# Altium PCB HW_Z-BAND_SMART_AMP_R1.PcbDoc (part 5 of 5)
Units mil, origin at the board's own origin, x right, y up, seen from the top; angles counter-clockwise.
Board outline 10200 x 3900 mil, 4 copper layers (Top Layer, Int1 (GND), Int2 (PWR), Bottom Layer), stack 60.134 mil thick; 398 components, 240 nets, 1098 pads, 2492 vias.
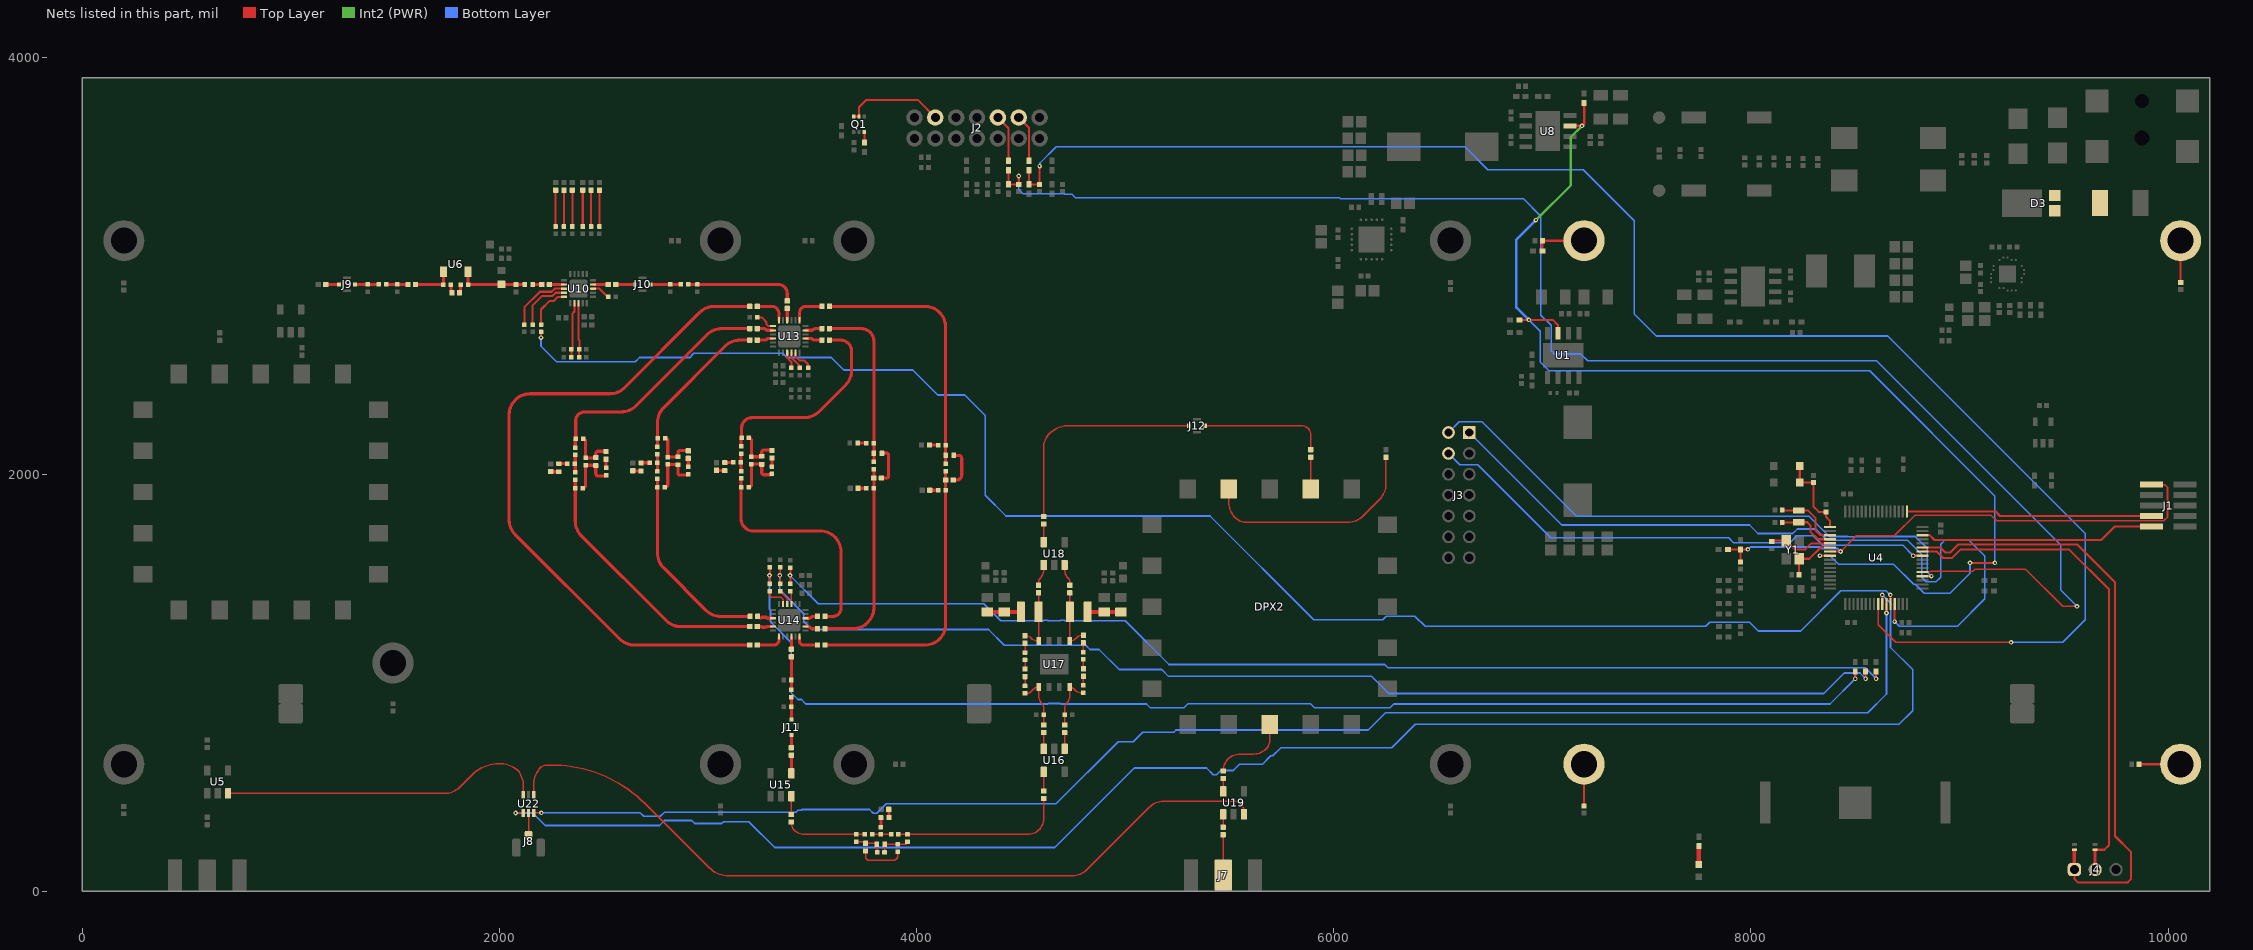
[diagram p6: the nets of this part, all layers, seen from the top]

## Via types
v1: diameter 22, hole 10, Top Layer to Bottom Layer, tented both sides, 2396 vias
v2: diameter 19.68, hole 7.87, Top Layer to Bottom Layer, tented both sides, 30 vias
v3: diameter 19.68, hole 7.87, Top Layer to Bottom Layer, 28 vias
v4: diameter 19.68, hole 9.84, Top Layer to Bottom Layer, tented both sides, 20 vias
v5: diameter 15.75, hole 7.87, Top Layer to Bottom Layer, tented both sides, 9 vias
v6: diameter 23.62, hole 11.81, Top Layer to Bottom Layer, 9 vias

## Nets (pads, with @x,y where several pads share a name; then routed paths per layer and width w, separated by ;. In a path a pad name is that pad's centre, name@x,y a point inside that pad or via, vN(x,y) a via of type N, cw(c..) or ccw(c..) an arc to the next point about the centre after c; other vN are vias at no path point) (continued)
NetC110_2: C110.2 J9.A | length 64.1
  Top Layer w15: C110.2@1168.11,2910 J9.A@1232.2,2910
NetC112_1: C112.1 R49.2 R51.2 | length 104.2
  Top Layer w15: R49.2@1457.72,2910 R51.2@1510,2910 C112.1@1561.89,2910
NetC112_2: C112.2 R5.2 U6.1 | length 195.7
  Top Layer w15: C112.2@1598.11,2910 1598.11,2909.45 R5.2@1731.89,2909.45 1732.28,2909.45 1732.28,2970 U6.1@1731.89,2970
NetC113_1: C113.1 U10.14 | length 72.1
  Top Layer w15: U10.14@2449.89,2909.68 2521.57,2909.68 C113.1@2521.89,2910
NetC113_2: C113.2 J10.C | length 91.1
  Top Layer w15: C113.2@2558.11,2910 J10.C@2649.21,2910
NetC116_1: C116.1 L7.1 R67.2 R98.1 | length 218.3
  Top Layer w15: R67.2@3196.85,2174.8 cw(c3196.85,2162.99) 3208.66,2162.99 R98.1@3208.66,2084.25 L7.1@3256.3,2084.25 ; L7.1@3257.87,2085.83 3257.87,2105.91 cw(c3267.72,2105.91) 3267.72,2115.75 C116.1@3305.51,2115.75
NetC116_2: C116.2 R97.1 | length 40.9
  Top Layer w15: R97.1@3307.09,2037.01 C116.2@3307.09,2077.95
NetC117_1: C117.1 L19.2 | length 43.8
  Top Layer w15: L19.2@2160,2910 C117.1@2203.78,2910
NetC117_2: C117.2 U10.2 | length 70.1
  Top Layer w15: C117.2@2240,2910 2309.69,2910 U10.2@2310,2909.68
NetC118_2: C118.2 R58.1 | length 174.2
  Top Layer w10: R58.1@2270,3187.72 C118.2@2270,3361.89
NetC119_2: C119.2 R59.1 | length 174.2
  Top Layer w10: R59.1@2480,3187.72 C119.2@2480,3361.89
NetC120_2: C120.2 R125.1 | length 174.2
  Top Layer w10: R125.1@2440,3187.72 C120.2@2440,3361.89
NetC121_2: C121.2 R126.1 | length 174.2
  Top Layer w10: R126.1@2400,3187.72 C121.2@2400,3361.89
NetC122_2: C122.2 R127.1 | length 174.2
  Top Layer w10: R127.1@2350,3187.72 C122.2@2350,3361.89
NetC123_2: C123.2 R128.1 | length 174.2
  Top Layer w10: R128.1@2310,3187.72 C123.2@2310,3361.89
NetC130_1: C130.1 U13.24 | length 155.6
  Top Layer w15: C130.1@3236.61,2805.12 3305.12,2805.12 cw(c3305.12,2769.45) 3340.79,2769.45 U13.24@3340.79,2738.39
NetC130_2: C130.2 C131.2 | length 3297.1
  Top Layer w15: C131.2@3200.39,1181.1 2647.72,1181.1 cw(c2647.72,1281.1) 2577.01,1210.39 2076.53,1710.87 cw(c2147.24,1781.58) 2047.24,1781.58 2047.24,2285.83 cw(c2147.24,2285.83) 2147.24,2385.83 2529.44,2385.83 ccw(c2529.44,2485.83) 2600.16,2415.12 2960.87,2775.83 cw(c3031.58,2705.12) 3031.58,2805.12 C130.2@3200.39,2805.12
NetC131_1: C131.1 U14.19 | length 134.2
  Top Layer w15: C131.1@3236.61,1181.1 3314.96,1181.1 ccw(c3314.96,1206.93) 3340.79,1206.93 U14.19@3340.79,1222.24
NetC132_1: C132.1 R80.2 R83.2 | length 535.1
  Top Layer w15: R80.2@2905.43,2910 R83.2@2950,2910 3338.03,2910 cw(c3338.03,2867.87) 3380.16,2867.87 C132.1@3380.16,2831.5
NetC132_2: C132.2 U13.22 | length 56.9
  Top Layer w15: U13.22@3380.16,2738.39 C132.2@3380.16,2795.28
NetC133_1: C133.1 U14.22 | length 60.8
  Top Layer w15: C133.1@3399.84,1161.42 U14.22@3399.84,1222.24
NetC133_2: C133.2 R81.1 R84.2 | length 158.3
  Top Layer w15: R81.1@3399.84,966.93 R84.2@3399.84,1013.78 C133.2@3399.84,1125.2
NetC134_1: C134.1 J11.A | length 60.2
  Top Layer w15: C134.1@3399.84,689.37 J11.A@3399.84,749.61
NetC134_2: C134.2 U15.6 | length 87
  Top Layer w15: U15.6@3399.84,566.18 C134.2@3399.84,653.15
NetC135_1: C135.1 U15.1 | length 87
  Top Layer w6.81: C135.1@3399.84,369.37 U15.1@3399.84,456.34
NetC135_2: C135.2 R108.1 R132.1 | length 386.1
  Top Layer w6.81: C135.2@3399.84,333.15 ccw(c3459.37,333.15) 3459.37,273.62 R108.1@3751.97,273.62
NetC139_1: C139.1 R86.2 | length 44.6
  Top Layer w6.81: R86.2@4520,985.43 C139.1@4520,1030
NetC139_2: C139.2 R87.1 | length 43.8
  Top Layer w6.81: C139.2@4520,1066.22 R87.1@4520,1110
NetC140_1: C140.1 R87.2 | length 44.6
  Top Layer w6.81: R87.2@4520,1145.43 C140.1@4520,1190
NetC140_2: C140.2 C141.2 L5.1 U17.8 | length 303.7
  Top Layer w6.81: C140.2@4520,1226.22 4522.91,1226.22 cw(c4522.91,1187.91) 4550,1215 4550.45,1214.55 ccw(c4585,1249.09) U17.8@4585,1200.24 L5.1@4585,1340 C141.2@4585,1431.89
NetC141_1: C141.1 U18.3 | length 103.7
  Top Layer w6.81: C141.1@4585,1468.11 4585,1481.03 cw(c4617.39,1481.03) 4594.49,1503.94 ccw(c4557.04,1541.39) 4610,1541.39 U18.3@4610,1565.08
NetC142_1: C142.1 J12.A | length 1084.4
  Top Layer w6.81: C142.1@4610,1798.11 4610,2147.44 4621.04,2174.09 4632.1,2190.64 cw(c4739.24,2083.5) 4708.7,2231.91 cw(c4716.22,2195.38) 4716.22,2232.68 J12.A@5306.69,2232.68
NetC142_2: C142.2 U18.4 | length 87
  Top Layer w6.81: U18.4@4610,1674.92 C142.2@4610,1761.89
NetC143_1: C143.1 DPX2.7 | length 151.9
  Top Layer w6.81: DPX2.7@5890,1930 C143.1@5890,2081.89
NetC143_2: C143.2 J12.C | length 611.2
  Top Layer w6.81: J12.C@5382.28,2232.68 5846.06,2232.68 ; C143.2@5890,2118.11 5890,2188.74 ccw(c5846.06,2188.74) 5853.65,2232.02 ; 5846.06,2232.68 cw(c5846.06,2188.74) 5853.65,2232.02 ; 5846.06,2232.68 5852.06,2232.68 cw(c5852.06,2230.42) 5853.65,2232.02
NetC144_1: C144.1 R109.2 R133.1 | length 836
  Top Layer w6.81: R109.2@3913.39,273.62 R133.1@3956.69,273.62 4534.29,273.62 ccw(c4534.29,349.33) 4610,349.33 C144.1@4610,445.47
NetC144_2: C144.2 U16.6 | length 91.9
  Top Layer w6.81: C144.2@4610,481.69 U16.6@4610,573.58
NetC145_1: C145.1 U16.1 | length 78.5
  Top Layer w6.81: U16.1@4610,683.43 C145.1@4610,761.89
NetC145_2: C145.2 R86.1 R90.1 U17.1 | length 263.3
  Top Layer w6.81: R86.1@4520,950 4532.93,950 ccw(c4532.93,967.07) 4545,955 4558.99,968.99 cw(c4585,942.98) U17.1@4585,979.76 4585,937.92 ccw(c4630.84,937.92) 4598.43,905.51 cw(c4570.48,877.57) 4610,877.57 R90.1@4610,846.46 C145.2@4610,798.11
NetC146_1: C146.1 U19.4 | length 62
  Top Layer w6.81: U19.4@5470,479.84 C146.1@5470,541.89
NetC146_2: C146.2 DPX2.18 | length 379.5
  Top Layer w6.81: C146.2@5470,578.11 cw(c5550.89,578.11) 5550.89,659 5617.03,659 ccw(c5617.03,740.94) 5674.97,683 ccw(c5631.08,726.89) 5693.15,726.89 DPX2.18@5693.15,800.08
NetC147_1: C147.1 J7.1 | length 193.9
  Top Layer w6.81: J7.1@5470,78 C147.1@5470,271.89
NetC147_2: C147.2 U19.3 | length 61.9
  Top Layer w6.81: C147.2@5470,308.11 U19.3@5470,370
NetC148_1: C148.1 U18.1 | length 103.7
  Top Layer w6.81: U18.1@4710,1565.08 4710,1541.39 ccw(c4762.96,1541.39) 4725.51,1503.94 cw(c4702.61,1481.03) 4735,1481.03 C148.1@4735,1468.11
NetC148_2: C148.2 C152.2 L6.2 U17.5 | length 304.7
  Top Layer w6.81: C148.2@4735,1431.89 L6.2@4735,1340 U17.5@4735,1200.24 ccw(c4735,1237.02) 4761.01,1211.01 4765,1215 cw(c4796.65,1183.35) 4796.65,1228.11 C152.2@4800,1228.11
NetC149_1: C149.1 DPX2.9 | length 1096.3
  Top Layer w6.81: DPX2.9@5496.3,1930 5496.3,1865.12 ccw(c5596.3,1865.12) 5525.59,1794.41 5530,1790 ccw(c5578.28,1838.28) 5578.28,1770 6068.58,1770 ccw(c6068.58,1870) 6139.29,1799.29 6220.71,1880.71 ccw(c6150,1951.42) 6250,1951.42 C149.1@6250,2081.89
NetC150_1: C150.1 U16.3 | length 78.5
  Top Layer w6.81: U16.3@4710,683.43 C150.1@4710,761.89
NetC150_2: C150.2 R91.2 R94.1 U17.4 | length 261.8
  Top Layer w6.81: C150.2@4710,798.11 R91.2@4710,846.46 4710,877.57 cw(c4749.52,877.57) 4721.57,905.51 ccw(c4689.16,937.92) 4735,937.92 U17.4@4735,979.76 cw(c4735,955.05) 4752.47,972.53 4760,965 ccw(c4790.7,995.7) 4790.7,952.28 R94.1@4800,952.28
NetC151_1: C151.1 R94.2 | length 44.2
  Top Layer w6.81: R94.2@4800,987.72 C151.1@4800,1031.89
NetC151_2: C151.2 R95.1 | length 44.2
  Top Layer w6.81: C151.2@4800,1068.11 R95.1@4800,1112.28
NetC152_1: C152.1 R95.2 | length 44.2
  Top Layer w6.81: R95.2@4800,1147.72 C152.1@4800,1191.89
NetC156_1: C156.1 L8.1 R57.1 R73.2 | length 223.2
  Top Layer w15: R73.2@2401.57,2169.29 cw(c2401.57,2157.48) 2413.39,2157.48 R57.1@2413.39,2078.74 2461.02,2078.74 ccw(c2461.02,2080.31) L8.1@2462.6,2080.31 2462.6,2100.39 cw(c2472.44,2100.39) 2472.44,2110.24 2510.24,2110.24 cw(c2510.24,2108.66) C156.1@2511.81,2108.66
NetC156_2: C156.2 R55.1 | length 40.9
  Top Layer w15: R55.1@2511.81,2031.5 C156.2@2511.81,2072.44
NetC157_2: C157.2 L9.1 | length 36.5
  Top Layer w15: C157.2@3044.19,2017.72 L9.1@3080.71,2017.72
NetC158_1: C158.1 L13.1 R107.1 R132.2 | length 145.8
  Top Layer w6.81: R132.2@3710.63,238.19 3748.43,238.19 cw(c3748.43,230.71) C158.1@3755.91,230.71 3805.12,230.71 cw(c3805.12,226.38) L13.1@3809.45,226.38 cw(c3809.45,224.8) 3811.02,224.8 R107.1@3811.02,187.01
NetC158_2: C158.2 R106.1 | length 224.6
  Top Layer w6.81: C158.2@3755.91,194.49 3755.91,165.35 ccw(c3771.65,165.35) 3771.65,149.61 3889.76,149.61 ccw(c3889.76,169.29) 3909.45,169.29 R106.1@3909.45,190.94
NetC159_2: C159.2 L18.1 | length 40
  Top Layer w15: C159.2@3866.54,393.7 cw(c3866.54,392.52) 3867.72,392.52 L18.1@3867.72,354.33
NetC160_2: C160.2 MTG10.0 | length 200
  Top Layer w10: C160.2@7200,410 MTG10.0@7200,610
NetC161_2: C161.2 MTG11.0 | length 200
  Top Layer w10: C161.2@9860,610 MTG11.0@10060,610
NetC162_2: C162.2 MTG12.0 | length 200
  Top Layer w10: C162.2@10060,2920 MTG12.0@10060,3120
NetC163_2: C163.2 MTG13.0 R1.2 | length 250
  Top Layer w12: R1.2@7000,3070 C163.2@7000,3120 MTG13.0@7200,3120
NetC164_1: C164.1 U13.2 | length 77.7
  Top Layer w15: C164.1@3236.61,2698.03 3267.17,2698.03 cw(c3267.17,2680.56) 3279.53,2692.91 ccw(c3286.18,2699.57) 3286.18,2690.16 U13.2@3312.24,2690.16
NetC164_2: C164.2 R73.1 R96.1 | length 1144
  Top Layer w15: R96.1@2364.17,2127.95 2364.17,2164.54 cw(c2370.89,2164.54) R73.1@2366.14,2169.29 2366.14,2255.91 cw(c2409.45,2255.91) 2409.45,2299.21 2584.56,2299.21 ccw(c2584.56,2399.21) 2655.27,2328.5 2995.51,2668.74 cw(c3066.22,2598.03) 3066.22,2698.03 C164.2@3200.39,2698.03
NetC165_1: C165.1 R99.2 R115.1 | length 1260.2
  Top Layer w15: R99.2@2364.17,1974.41 R115.1@2364.17,1933.07 2364.17,1775.67 ccw(c2464.17,1775.67) 2393.46,1704.96 2799.45,1298.97 ccw(c2870.16,1369.68) 2870.16,1269.68 C165.1@3200.39,1269.68
NetC165_2: C165.2 U14.17 | length 79.1
  Top Layer w15: C165.2@3236.61,1269.68 cw(c3238.52,1267.78) 3238.52,1270.47 3256.29,1270.47 3260.27,1266.5 3273.27,1266.5 3275.27,1268.5 3281.73,1268.5 3283.71,1270.47 U14.17@3312.24,1270.47
NetC166_1: C166.1 U13.15 | length 80.8
  Top Layer w15: U13.15@3467.76,2650.79 3491.58,2650.79 cw(c3491.58,2633.31) 3503.94,2645.67 ccw(c3510.59,2652.32) 3510.59,2642.91 C166.1@3546.46,2642.91
NetC166_2: C166.2 R67.1 R100.1 | length 981.9
  Top Layer w15: R100.1@3159.45,2133.46 R67.1@3159.45,2174.8 ; R67.1@3161.42,2174.8 3161.42,2220.47 cw(c3212.6,2220.47) 3212.6,2271.65 3462.52,2271.65 ccw(c3462.52,2371.65) 3533.23,2300.94 3659.69,2427.4 ccw(c3588.98,2498.11) 3688.98,2498.11 3688.98,2590.55 ccw(c3636.61,2590.55) 3636.61,2642.91 C166.2@3582.68,2642.91
NetC167_1: C167.1 R68.1 R101.2 | length 1131.8
  Top Layer w15: R101.2@3159.45,1979.92 R68.1@3159.45,1938.58 3159.45,1785.43 ccw(c3216.54,1785.43) 3216.54,1728.35 3537.8,1728.35 cw(c3537.8,1628.35) 3637.8,1628.35 3637.8,1357.42 cw(c3599.27,1357.42) 3599.27,1318.9 C167.1@3561.42,1318.9
NetC167_2: C167.2 U14.4 | length 59.9
  Top Layer w15: U14.4@3467.76,1309.84 3483.71,1309.84 ccw(c3483.71,1327.32) 3496.06,1314.96 cw(c3505.57,1305.46) 3505.57,1318.9 C167.2@3525.2,1318.9
NetC168_2: C168.2 L4.1 L19.1 R6.2 U6.3 | length 332.5
  Top Layer w15: U6.3@1850,2970 R6.2@1850,2909.45 2010,2909.45 L4.1@2010,2910 C168.2@2080,2910 L19.1@2121.42,2910
NetC169_1: C169.1 R5.1 | length 40.5
  Top Layer w15: R5.1@1767.32,2909.45 cw(c1767.32,2907.48) 1769.29,2907.48 C169.1@1769.29,2870.08
NetC169_2: C169.2 R6.1 | length 44.5
  Top Layer w15: C169.2@1805.51,2870.08 ccw(c1805.51,2879.13) 1814.57,2879.13 R6.1@1814.57,2909.45
NetC170_2: C170.2 L10.1 | length 39.7
  Top Layer w15: C170.2@2246.06,2013.39 ccw(c2248.91,2016.24) 2248.91,2012.2 L10.1@2285.43,2012.2
NetC171_1: C171.1 L16.1 R104.1 R121.2 | length 218.3
  Top Layer w15: R121.2@2795.59,2173.15 cw(c2795.59,2161.34) 2807.4,2161.34 R104.1@2807.4,2082.6 L16.1@2855.04,2082.6 ; L16.1@2856.61,2084.17 2856.61,2104.25 cw(c2866.46,2104.25) 2866.46,2114.09 C171.1@2904.25,2114.09
NetC171_2: C171.2 R103.1 | length 40.9
  Top Layer w15: R103.1@2905.83,2035.35 C171.2@2905.83,2076.3
NetC172_1: C172.1 U13.4 | length 77.7
  Top Layer w15: C172.1@3236.61,2642.91 3272.87,2642.91 ccw(c3272.87,2652.32) 3279.53,2645.67 cw(c3291.88,2633.31) 3291.88,2650.79 U13.4@3312.24,2650.79
NetC172_2: C172.2 R110.1 R121.1 | length 737.8
  Top Layer w15: R110.1@2758.19,2131.81 2758.19,2248.26 cw(c2858.19,2248.26) 2787.48,2318.97 3082.13,2613.62 cw(c3152.84,2542.91) 3152.84,2642.91 C172.2@3200.39,2642.91
NetC173_1: C173.1 C175.1 R112.2 R118.2 | length 954.7
  Top Layer w15: C175.1@3561.42,1259.84 3695.28,1259.84 ccw(c3695.28,1359.84) 3795.28,1359.84 R118.2@3795.28,1933.07 C173.1@3795.28,1982.28 R112.2@3795.28,2023.62
NetC173_2: C173.2 L11.2 | length 178.8
  Top Layer w15: C173.2@3831.5,1982.28 3856.3,1982.28 ccw(c3856.3,1992.13) 3866.14,1992.13 3866.14,2090.55 ccw(c3854.33,2090.55) 3854.33,2102.36 3835.83,2102.36 ccw(c3835.83,2100.39) L11.2@3833.86,2100.39
NetC174_1: C174.1 U13.17 | length 80.8
  Top Layer w15: U13.17@3467.76,2690.16 3497.28,2690.16 ccw(c3497.28,2699.57) 3503.94,2692.91 cw(c3516.29,2680.56) 3516.29,2698.03 C174.1@3546.46,2698.03
NetC174_2: C174.2 L11.1 R112.1 R117.2 | length 825.7
  Top Layer w15: C174.2@3582.68,2698.03 3735.04,2698.03 cw(c3735.04,2637.8) 3795.28,2637.8 R117.2@3795.28,2149.61 L11.1@3795.28,2100.39 R112.1@3795.28,2059.06
NetC175_2: C175.2 U14.2 | length 60.3
  Top Layer w15: U14.2@3467.76,1270.47 3475.97,1270.47 cw(c3475.97,1247.62) 3492.13,1263.78 ccw(c3501.63,1273.28) 3501.63,1259.84 C175.2@3525.2,1259.84
NetC176_1: C176.1 R111.2 R131.1 | length 941.4
  Top Layer w15: R111.2@2758.19,1978.27 R131.1@2758.19,1936.93 2758.19,1621.82 ccw(c2858.19,1621.82) 2787.48,1551.1 2990.4,1348.19 ccw(c3061.11,1418.9) 3061.11,1318.9 C176.1@3201.97,1318.9
NetC176_2: C176.2 U14.15 | length 80.4
  Top Layer w15: C176.2@3238.19,1318.9 ccw(c3260.05,1340.76) 3255.32,1310.21 3259.94,1314.83 3279.41,1314.83 3284.39,1309.84 U14.15@3312.24,1309.84
NetC177_2: C177.2 L17.1 | length 36.5
  Top Layer w15: C177.2@2642.93,2016.06 L17.1@2679.45,2016.06
NetC179_2: C179.2 R118.1 | length 40.9
  Top Layer w15: C179.2@3718.9,1933.07 R118.1@3759.84,1933.07
NetC187_1: C187.1 C189.1 R122.2 R124.2 | length 1368.2
  Top Layer w15: C189.1@3561.42,1181.1 4039.68,1181.1 ccw(c4039.68,1281.1) 4139.68,1281.1 R124.2@4139.68,1923.39 R122.2@4139.69,2013.94
NetC187_2: C187.2 L14.2 | length 180.4
  Top Layer w15: C187.2@4175.91,1972.6 4175.91,1972.44 4192.91,1972.44 ccw(c4192.91,1996.06) 4216.54,1996.06 4216.54,2074.8 ccw(c4200.63,2074.8) 4200.63,2090.71 L14.2@4178.27,2090.71
NetC188_1: C188.1 U13.19 | length 160.6
  Top Layer w15: U13.19@3439.21,2738.39 3439.21,2773.86 cw(c3470.47,2773.86) 3470.47,2805.12 C188.1@3546.46,2805.12
NetC188_2: C188.2 L14.1 R122.1 R123.2 | length 1269.8
  Top Layer w15: C188.2@3582.68,2805.12 4039.69,2805.12 cw(c4039.69,2705.12) 4139.69,2705.12 R123.2@4139.69,2139.92 L14.1@4139.69,2090.71 R122.1@4139.69,2049.37
NetC189_2: C189.2 U14.24 | length 119.5
  Top Layer w15: U14.24@3439.21,1222.24 3439.21,1198.58 ccw(c3456.69,1198.58) 3441.21,1190.46 3448.57,1183.1 ccw(c3456.69,1198.58) 3456.69,1181.1 C189.2@3525.2,1181.1
NetC190_2: C190.2 R124.1 | length 40.9
  Top Layer w15: C190.2@4063.31,1923.39 R124.1@4104.25,1923.39
NetD3_2: D3.2 F1.2
NetD6_1: D6.1 R32.1 | length 87.8
  Top Layer w20: D6.1@7750,129.53 R32.1@7750,217.36
NetJ2_9: J2.9 Q1.2 Q1.3 | length 485.7
  Top Layer w10: Q1.3@3698.82,3714.8 Q1.2@3724.41,3714.8 3724.41,3759.41 3760,3795 4005,3795 J2.9@4090,3710
NetJ8_1: J8.1 U22.5 | length 106.7
  Top Layer w6.81: J8.1@2140,270.04 U22.5@2140,376.69
NetJ9_C: J9.C R49.1 R50.2 | length 114.5
  Top Layer w15: J9.C@1307.8,2910 R50.2@1370,2910 R49.1@1422.28,2910
NetJ10_A: J10.A R80.1 R82.2 | length 145.2
  Top Layer w15: J10.A@2724.8,2910 R82.2@2820,2910 R80.1@2870,2910
NetJ11_C: J11.C R81.2 R85.2 | length 106.3
  Top Layer w15: J11.C@3399.84,825.2 R85.2@3399.84,885.83 R81.2@3399.84,931.5
NetL5_2: L5.2 R88.1 R89.1 | length 160.4
  Top Layer w20: R88.1@4340,1340 R89.1@4420,1340 L5.2@4500.35,1340
NetL6_1: L6.1 R92.2 R93.2 | length 160.4
  Top Layer w20: L6.1@4819.65,1340 R92.2@4900,1340 R93.2@4980,1340
NetL7_2: L7.2 R68.2 R97.2 R98.2 | length 254.2
  Top Layer w15: R68.2@3194.88,1938.58 ccw(c3194.88,1952.36) 3208.66,1952.36 R98.2@3208.66,2048.82 L7.2@3254.07,2048.82 ; L7.2@3257.87,2047.24 3257.87,2007.48 ccw(c3267.72,2007.48) 3267.72,1997.64 R97.2@3303.15,1997.64
NetL8_2: L8.2 R55.2 R57.2 R115.2 | length 264.6
  Top Layer w15: R115.2@2399.61,1933.07 ccw(c2399.61,1946.85) 2413.39,1946.85 R57.2@2413.39,2043.31 2458.8,2043.31 cw(c2458.8,2037.93) L8.2@2462.6,2041.73 2462.6,2001.97 ccw(c2472.44,2001.97) 2472.44,1992.13 2507.87,1992.13 ccw(c2507.87,1996.06) R55.2@2511.81,1996.06
NetL9_2: L9.2 R105.1 | length 40.4
  Top Layer w15: L9.2@3081.66,2056.69 R105.1@3122.05,2056.69
NetL10_2: L10.2 R102.1 | length 41.4
  Top Layer w15: L10.2@2285.43,2050.79 cw(c2286.38,2049.84) 2286.38,2051.18 R102.1@2326.77,2051.18
NetL12_2: L12.2 R117.1 | length 41.7
  Top Layer w15: L12.2@3718.11,2149.61 R117.1@3759.84,2149.61
NetL13_2: L13.2 R106.2 R107.2 R133.2 | length 155.7
  Top Layer w6.81: R107.2@3846.46,187.01 ccw(c3846.46,188.58) 3848.03,188.58 L13.2@3848.03,226.38 R106.2@3909.45,226.38 3944.88,226.38 ccw(c3944.88,238.19) R133.2@3956.69,238.19
NetL15_2: L15.2 R123.1 | length 41.7
  Top Layer w15: L15.2@4062.52,2139.92 R123.1@4104.25,2139.92
NetL16_2: L16.2 R103.2 R104.2 R131.2 | length 254.2
  Top Layer w15: R131.2@2793.62,1936.93 ccw(c2793.62,1950.71) 2807.4,1950.71 R104.2@2807.4,2047.17 L16.2@2852.81,2047.17 ; L16.2@2856.61,2045.59 2856.61,2005.83 ccw(c2866.46,2005.83) 2866.46,1995.98 R103.2@2901.89,1995.98
NetL17_2: L17.2 R113.1 | length 40.4
  Top Layer w15: L17.2@2680.4,2055.04 R113.1@2720.79,2055.04
NetL18_2: L18.2 R114.1 | length 45.7
  Top Layer w15: R114.1@3828.74,309.06 3829.13,309.06 L18.2@3829.13,354.33
NetQ1_6: Q1.6 R48.2 | length 50
  Top Layer w10: R48.2@3750,3590 Q1.6@3750,3640
NetR52_2: R52.2 U10.13 | length 89
  Top Layer w10: U10.13@2449.89,2890 2480,2890 2520,2850 R52.2@2522.28,2850
NetR53_1: R53.1 U4.28 | length 7523.2
  Top Layer w10: v1(2200,2655) R53.1@2200,2682.28 ; v1(8668.63,1422) 8668.9,1421.73 U4.28@8668.9,1378.5
  Bottom Layer w8: v1(2200,2655) 2200,2614.43 2274.43,2540 2556,2540 2651.72,2540 2671.72,2560 2915.31,2560 2920,2564.69 2920,2568.28 2931.72,2580 3358.28,2580 3378.28,2560 3591.72,2560 3651.72,2500 3981.72,2500 4101.72,2380 4231,2380 4329,2282 4329,1900 4429,1800 5407,1800 5904.55,1302.45 6234.17,1302.45 6251.72,1320 6389,1320 6438,1271 7782.72,1271 7801.72,1290 7993.28,1290 8034.28,1249 8238,1249 8431,1442 8647.04,1442 8667.04,1422 v1(8668.63,1422)
NetR53_2: R53.2 U10.5 | length 207.4
  Top Layer w10: R53.2@2200,2717.72 2200,2790 2240,2830 2260,2830 2280.63,2850.63 U10.5@2310,2850.63
NetR54_2: R54.2 U10.4 | length 267.3
  Top Layer w10: R54.2@2160,2717.72 2160,2810 2205,2855 2255,2855 2270.31,2870.31 U10.4@2310,2870.31
NetR56_1: R56.1 U10.3 | length 309.6
  Top Layer w10: R56.1@2120,2717.72 2120,2800 2195,2875 2250,2875 2265,2890 U10.3@2310,2890
NetR60_2: R60.2 R61.2 U10.7 | length 266.2
  Top Layer w10: R61.2@2345.43,2560 R60.2@2345.43,2600 2350,2604.57 2350,2770 2360.26,2780.26 U10.7@2360.26,2820.06
NetR62_2: R62.2 R63.2 U10.8 | length 264.1
  Top Layer w10: U10.8@2379.94,2820.06 2379.94,2799.64 2379,2798.7 2379,2781.3 2379.94,2780.36 2379.94,2645.06 2385,2640 2385,2602.72 R62.2@2382.28,2600 R63.2@2382.28,2560
NetR69_2: R69.2 R75.2 R116.2 | length 5929.6
  Top Layer w8: R75.2@3297.24,1474.41 3297.24,1512.76 v1(3295,1515) 3297.24,1517.24 R69.2@3297.24,1554.68
  Top Layer w10: v1(8500,1020) R116.2@8500,1054.72
  Bottom Layer w8: v1(3295,1515) 3295,1353.28 3300,1348.28 3300,1292.92 3400,1192.92 3400,951.72 3431.72,920 3448.28,920 3469.28,899 4628.7,899 4630.7,901 4689.3,901 4691.3,899 5102.72,899 5121.72,880 5281.72,880 5301.72,900 5888.28,900 5908.28,880 6268.28,880 6287.28,899 8379,899 v1(8500,1020)
NetR70_2: R70.2 R77.2 R119.2 | length 5669.9
  Top Layer w8: R77.2@3346.46,1474.41 3346.46,1512.76 v1(3344.21,1515) 3346.46,1517.24 R70.2@3346.46,1554.68
  Top Layer w10: v1(8550,1020) R119.2@8550,1054.72
  Bottom Layer w8: v1(3344.21,1515) 3344.21,1446.79 3460,1331 3460,1295 3499,1256 4345,1256 4421,1180 4471.72,1180 4488.28,1180 4811.72,1180 4831.72,1160 4875,1160 4971,1064 5175,1064 5208,1031 6182,1031 6264,949 8349,949 8447,1047 8498.72,1047 8523,1047 v1(8550,1020)
NetR71_2: R71.2 R79.2 R120.2 | length 5531.1
  Top Layer w8: R79.2@3395.67,1474.41 3395.67,1512.76 v1(3393.43,1515) 3395.67,1517.24 R71.2@3395.67,1552.72
  Top Layer w10: v1(8600,1020) R120.2@8600,1054.72
  Bottom Layer w8: v1(3393.43,1515) 3528.43,1380 3591.72,1380 3608.28,1380 3671.72,1380 3688.28,1380 3751.72,1380 3768.28,1380 3811.72,1380 3828.28,1380 4091.72,1380 4108.28,1380 4322,1380 4404,1298 4611,1298 4610.36,1298.64 4611.72,1300 4628.28,1300 4630.28,1298 4689.72,1298 4691.72,1300 4708.28,1300 4710.28,1298 5000,1298 5210,1088 6243.72,1088 6259.72,1072 8548,1072 v1(8600,1020)
NetR72_2: R72.2 U13.1 | length 99.3
  Top Layer w10: R72.2@3236.22,2751.97 3258.03,2751.97 3280,2730 3280,2720 3290.16,2709.84 U13.1@3312.24,2709.84
NetR74_2: R74.2 U13.11 | length 110.8
  Top Layer w10: U13.11@3419.53,2582.87 3419.53,2565.47 3440,2545 3463,2545 3480,2528 R74.2@3480,2510.63
NetR75_1: R75.1 U14.11 | length 113.8
  Top Layer w8: R75.1@3297.24,1438.98 3297.24,1417.76 3305,1410 3350,1410 3360.47,1399.53 U14.11@3360.47,1377.76
NetR76_2: R76.2 U13.10 | length 88.9
  Top Layer w10: U13.10@3399.84,2582.87 3400,2582.72 3400,2560 3440,2520 R76.2@3440,2510.63
NetR77_1: R77.1 U14.10 | length 75.2
  Top Layer w8: R77.1@3346.46,1438.98 3346.46,1438.54 3380.16,1404.84 U14.10@3380.16,1377.76
NetR78_2: R78.2 U13.9 | length 80.5
  Top Layer w10: U13.9@3380.16,2582.87 3380.16,2557.84 3400,2538 R78.2@3400,2510.63
NetR79_1: R79.1 U14.9 | length 62.9
  Top Layer w8: R79.1@3395.67,1438.98 3399.84,1434.8 U14.9@3399.84,1377.76
NetR96_2: R96.2 R99.1 R102.2 | length 82.7
  Top Layer w15: R99.1@2364.17,2009.84 R96.2@2364.17,2092.52
NetR100_2: R100.2 R101.1 R105.2 | length 82.7
  Top Layer w15: R101.1@3159.45,2015.35 R100.2@3159.45,2098.03
NetR108_2: R108.2 R109.1 R114.2 | length 90.6
  Top Layer w6.81: R108.2@3787.4,273.62 R109.1@3877.95,273.62
NetR110_2: R110.2 R111.1 R113.2 | length 82.7
  Top Layer w15: R111.1@2758.19,2013.7 R110.2@2758.19,2096.38
NetU4_26: U4.26 U22.4 | length 7787.6
  Top Layer w8: v1(2078,376.39) 2078.31,376.69 U22.4@2114.41,376.69
  Top Layer w10: v1(8629.26,1422) 8629.53,1421.73 U4.26@8629.53,1378.5
  Bottom Layer w8: v1(2078,376.39) 2160.61,376.39 2221,316 2767.72,316 2791.72,340 2922.36,340 2936.42,325.94 3067.06,325.94 3076.12,335 3196,335 3320,211 4663,211 5044,592 5389.72,592 5421.72,560 5438.28,560 5458.28,580 5518.28,580 5548.28,610 5658.28,610 5698.28,650 5708.28,650 5747.28,689 6278,689 6390,801 8710,801 8775,866 8775,1064 8669,1170 8669,1326.24 8669.48,1326.72 8669.48,1381.78 v1(8629.26,1422)
NetU4_27: U4.27 U22.6 | length 7181.1
  Top Layer w8: U22.6@2165.59,376.69 2201.69,376.69 v1(2202,377)
  Top Layer w10: U4.27@8649.21,1378.5 8649.21,1335.27 v1(8649.48,1335)
  Bottom Layer w8: v1(2202,377) 2674.72,377 2691.72,360 2771.72,360 2791.72,380 3421.72,380 3431.72,390 3448.28,390 3451.28,393 3774.54,393 3792.62,374.92 3809.19,374.92 3854.27,420 4668.28,420 4966.28,718 5039,718 5085,764 5234,764 5244,774 6165,774 6248,857 8560,857 8649.48,946.48 v1(8649.48,1335)
NetU5_1: U5.1 U22.3 | length 1567.4
  Top Layer w6.81: U5.1@700,470 1738.58,470 ccw(c1738.58,570) 1809.29,499.29 1870.43,560.43 cw(c1995.88,434.98) 1995.88,612.39 cw(c2002.22,480.55) 2096.49,572.94 2114.41,529.06 U22.3@2114.41,463.31
NetU19_1: U19.1 U22.1 | length 3882.5
  Top Layer w6.81: U22.1@2165.59,463.31 2165.59,514.17 cw(c2283.57,514.17) 2200.15,597.59 2217.63,605.41 cw(c2252.78,-23.3) 2698.04,421.96 3006.91,113.09 ccw(c3098.87,205.05) 3098.87,75 4745.58,75 ccw(c4745.58,175) 4816.29,104.29 5114.71,402.71 cw(c5185.42,332) 5185.42,432 5525.44,432 cw(c5525.44,394.44) 5552,421 cw(c5508.54,377.54) 5570,377.54 U19.1@5570,370
NRST: C56.2 J1.10 R22.2 R30.2 U4.7 | length 2548.1
  Top Layer w8: v1(8430,1630) 8505,1705 8687,1705 8786.13,1804.13 9150.87,1804.13 9178.57,1776.43 9978.53,1776.43 9996.69,1794.59 9996.69,1938.31 9985,1950 J1.10@9919.88,1950
  Top Layer w10: R30.2@7890,1640 R22.2@7950,1640 ; C56.2@7950,1580 R22.2@7950,1640 ; v1(7985,1640) R22.2@7950,1640 ; U4.7@8378.5,1629.53 8429.53,1629.53 v1(8430,1630)
  Bottom Layer w10: v1(7985,1640) 7985.86,1640 7996.86,1651 8332.2,1651 8338.2,1645 8413.14,1645 8428.14,1630 v1(8430,1630)
OSC24M_IN: C59.1 U4.5 Y1.3 | length 310
  Top Layer w10: C59.1@8100,1678.54 8103.31,1681.85 Y1.3@8168.5,1681.85 8198.86,1651.5 8198.86,1650.15 8204.72,1644.29 8206.06,1644.29 8210.35,1640 8260,1640 8288.9,1668.9 U4.5@8378.5,1668.9
OSC24M_OUT: C62.1 U4.6 Y1.1 | length 246.7
  Top Layer w10: C62.1@8230,1518.54 8230,1593.74 Y1.1@8231.5,1595.24 8280.24,1595.24 8334.21,1649.21 U4.6@8378.5,1649.21
OSC32_IN: C57.1 U4.3 Y2.2 | length 313.5
  Top Layer w10: C57.1@8150,1828.54 8151.46,1827.09 Y2.2@8230,1827.09 8272.91,1827.09 8310,1790 8310,1730 8331.73,1708.27 U4.3@8378.5,1708.27
OSC32_OUT: C58.1 U4.4 Y2.1 | length 280.4
  Top Layer w10: C58.1@8150,1768.54 8228.54,1768.54 Y2.1@8230,1770 8270,1770 8285,1755 8285,1725 8321.42,1688.58 U4.4@8378.5,1688.58
PD_OUTADJ: J3.4 U4.41 | length 2502.3
  Top Layer w10: v1(8778,1609.57) 8778.27,1609.84 U4.41@8821.5,1609.84
  Bottom Layer w8: J3.4@6549.8,2100 6603.8,2046 6690,2046 7041,1695 7893,1695 7916,1672 8187,1672 8220,1705 8298,1705 8344,1659 8728.57,1659 v1(8778,1609.57)
RF_PWR_EN: R3.2 R39.2 U1.3 U4.8 U8.3 | length 5531.7
  Top Layer w8: v1(9050,1575) v1(9169,1575)
  Top Layer w10: R3.2@6890,2740 v1(6935,2740) 7050,2740 7075,2715 U1.3@7075,2676.3 ; v1(8330,1610) 8330.16,1609.84 U4.8@8378.5,1609.84
  Top Layer w12: U8.3@7132.6,3670 v1(7190,3670) 7200,3680 R39.2@7200,3780
  Int2 (PWR) w12: v1(6969,3218) 7136,3385 7136,3616 v1(7190,3670)
  Bottom Layer w8: v1(6935,2740) 6990,2685 6990,2538 7032,2496 8569,2496 9169,1896 v1(9169,1575) ; v1(8330,1610) 8379,1610 8420,1569 8683,1569 8779.91,1472.09 8787.91,1472.09 8830,1430 8954,1430 9050,1526 v1(9050,1575)
  Bottom Layer w12: v1(6935,2740) 6876,2799 6876,3125 v1(6969,3218)
RIGHT_BUT: J2.13 R21.1 | length 228.1
  Top Layer w10: J2.13@4490,3710 4540,3660 R21.1@4540,3502.64
RIGHT_BUT_uC: C22.2 R21.2 R24.1 U4.25 | length 7878.4
  Top Layer w8: U4.25@8609.84,1378.5 8609.84,1279.16 8694,1195 9246,1195 v1(9247,1194)
  Top Layer w10: R21.2@4540,3457.36 R24.1@4540,3390 C22.2@4590,3390 v1(4590,3477)
  Bottom Layer w8: v1(4590,3477) 4591.76,3478.76 4591.76,3491.76 4670,3570 6629,3570 6739,3460 7196,3460 7440,3216 7440,2988 7440,2768 7545.5,2662.5 8655.5,2662.5 9602,1716 9602,1302 9494,1194 v1(9247,1194)
SPI2_MOSI: J3.2 U4.36 | length 2754.3
  Top Layer w10: U4.36@8821.5,1511.42 8864.73,1511.42 v1(8865,1511.68)
  Bottom Layer w8: J3.2@6549.8,2200 6601.8,2252 6711,2252 7164,1799 8278,1799 8375,1702 8463.62,1702 8464.62,1701 8637.7,1701 8638.7,1702 8788,1702 8845.15,1644.85 8845.15,1638.23 8845,1638.08 8845,1531.68 v1(8865,1511.68)
SPI2_SCLK: J3.1 U4.29 | length 3840.6
  Top Layer w10: U4.29@8688.58,1378.5 8688.58,1294.42 v1(8689,1294)
  Bottom Layer w8: J3.1@6649.8,2200 7092.8,1757 7993,1757 8034,1716 8201,1716 8223,1738 8310,1738 8365,1683 8750,1683 8818,1615 8818,1507 8840,1485 8887,1485 8909,1507 8909,1664 8930,1685 9044,1685 9121,1608 9121,1403 8990,1272 8711,1272 v1(8689,1294)
SWDCLK: J1.4 U4.49 | length 1181.1
  Top Layer w10: U4.49@8747.64,1821.5 9172.5,1821.5 9194,1800 J1.4@9919.88,1800
SWDIO: J1.2 U4.46 | length 1134.9
  Top Layer w10: U4.46@8821.5,1708.27 8856.73,1708.27 8880,1685 9680,1685 9745,1750 J1.2@9919.88,1750
UART1_RX: D1.2 J4.1 U4.43 | length 2902.8
  Top Layer w10: U4.43@8821.5,1649.21 8907.79,1649.21 8932,1625 8956,1625 8995,1664 9563,1664 9745,1482 9745,266 9821,190 9821,59 9806,44 9567,44 9550,61 J4.1@9550,105
  Top Layer w15: J4.1@9550,105 D1.2@9550,200
UART1_TX: D10.2 J4.2 U4.42 | length 2399.9
  Top Layer w10: U4.42@8821.5,1629.53 8891.47,1629.53 8923,1598 8963,1598 9004,1639 9525.25,1639 9716,1448.25 9716,222 9694,200 D10.2@9650,200
  Top Layer w15: J4.2@9650,105 D10.2@9650,200
uC_VBAT: C63.2 C64.2 D7.2 D9.2 U4.1 | length 411.4
  Top Layer w10: D9.2@8234.02,2040 D7.2@8234.02,1960 C63.2@8300,1960 8300,1845 8325,1820 C64.2@8360,1820 8360,1795 8378.5,1776.5 U4.1@8378.5,1747.64
UP_BUT: J2.12 R45.1 | length 228.1
  Top Layer w10: J2.12@4390,3710 4440,3660 R45.1@4440,3502.64
UP_BUT_uC: C24.2 R25.1 R45.2 U4.37 | length 7419.6
  Top Layer w8: U4.37@8821.5,1531.1 8822.63,1532.23 8859.23,1532.23 8862,1535 9064,1535 9074,1545 9316,1545 9494,1367 v1(9563,1367)
  Top Layer w10: R45.2@4440,3457.36 R25.1@4440,3390 C24.2@4490,3390 v1(4490,3430)
  Bottom Layer w8: v1(4490,3430) 4490,3365 4510,3345 4708.28,3345 4710.28,3343 4745,3343 4762,3326 6026,3326 6032,3320 6910,3320 6993,3237 6993,2763 7042.07,2713.93 7042.07,2591.93 7057.25,2576.75 7184.25,2576.75 7217,2544 8602,2544 9485,1661 9485,1445 v1(9563,1367)
pads on no net: DPX1.20 DPX2.20 J1.6 J1.7 J1.8 J3.3 J3.10 J3.12 J5.M U2.2 U2.5 U2.6 U2.7 U2.9 U2.10 U2.11 U2.12 U4.20 U4.45 U4.59 U5.6 U9.2 U9.4 U9.6 U9.8 U9.9 U9.10 U9.12 U9.17 U9.18 U9.19 U12.2 U12.3 U14.1 U15.2 U15.3 U16.2 U18.2 U19.6

## Polygon pours and split planes (outlines as drawn)
GND on Top Layer "NONET_L-01_P-001" (solid, pour order 18): 3563.46,3503.46 3563.46,3816.54 3482.36,3897.64 0,3897.64 0,0 6397.64,0 6397.64,2362.2 5492.13,3267.72 4251.97,3267.72 4074.8,3444.88 3622.05,3444.88
NetC75_1 on Top Layer "NONET_L-01_P-001" (solid, pour order 8): 6960,3610 6960,3370 6930,3340 6650,3340 6630,3360 6630,3800 6650,3820 6800,3820 6820,3800 6820,3670 6830,3660 6910,3660
NetC27_2 on Top Layer "NONET_L-01_P-001" (solid, pour order 5): 8560,3480 7900,3480 7880,3460 7880,3220 7900,3200 8540,3200 8580,3240 8580,3460
GND_IN on Top Layer "NONET_L-01_P-001" (solid, pour order 0): 9890,3890 8752.2,3890 8731.18,3871.18 8720,3860 8720,3560 8760,3520 9160,3520 9180,3540 9180,3580 9220,3620 9520,3620 9560,3580 9560,3460 9580,3440 9760,3440 9900,3580 9900,3880
+3V8 on Top Layer "NONET_L-01_P-001" (solid, pour order 13): 8480,3140 8450,3110 8450,2620 8465,2605 8865,2605 8910,2650 8910,2840 8975,2905 8975,2950 8999.17,2974.17 9162.28,2974.17 9204.8,3016.69 9204.8,3130.2 9195,3140
+3V3 on Top Layer "NONET_L-01_P-001" (solid, pour order 14): 9175.42,2945.41 9000.41,2945.41 8985,2930 8985,2905 8920,2840 8920,2785 8930,2775 9155,2775 9170,2790 9205,2790 9210,2795 9210,2850 9200,2860 9200,2910 9195,2915
+5V on Top Layer "NONET_L-01_P-001" (solid, pour order 16): 6940,1875 6730,1665 6490,1665 6440,1615 6440,1500 6465,1475 6925,1475 6970,1520 6970,1642.56 7002.44,1675 7385,1675 7400,1690 7400,1920 7380,1940 6970,1940 6940,1910
NetD3_2 on Top Layer "NONET_L-01_P-001" (solid, pour order 1): 9780,3380 9780,3200 9750,3170 9420,3170 9400,3190 9400,3400 9420,3420 9740,3420
MAIN_VDC on Top Layer "NONET_L-01_P-001" (solid, pour order 11): 7090,2955 7090,3315 7120,3345 7705,3345 7805,3245 7820,3230 7820,2988.51 7858.51,2950 7920,2950 7940,2930 7940,2850 7930,2840 7860,2840 7820,2800 7620,2800 7455,2635 7100,2635 7095,2640 7095,2725 7060,2760 7060,2925
MAIN_VDC on Top Layer "NONET_L-01_P-001" (solid, pour order 7): 7420,3520 7395,3545 7395,3720 7375,3740 7225,3740 7215,3730 7215,3685 7185,3655 7100,3655 7090,3645 7090,3310 7105,3295 7365,3295 7400,3260 7400,3220 7420,3200 7800,3200 7820,3220 7820,3500 7800,3520
NetC2_1 on Top Layer "NONET_L-01_P-001" (solid, pour order 15): 7150,2505 7150,2375 7145,2370 7035,2370 7010,2345 7010,2190 7030,2170 7320,2170 7375,2225 7375,2465 7335,2505
NetC44_1 on Top Layer "NONET_L-01_P-001" (solid, pour order 12): 8076.95,2947.74 8207.26,2947.74 8225,2930 8225,2800 8250,2775 8415,2775 8425,2785 8425,3115 8400,3140 8100,3140 8075.29,3115.29
+8V on Top Layer "NONET_L-01_P-001" (solid, pour order 10): 5990,3100 6120,3100 6140,3080 6140,2820 6130,2810 6080,2810 6040,2850 5980,2850 5970,2860 5970,3080
+9V on Top Layer "NONET_L-01_P-001" (solid, pour order 9): 5850,3790 5880,3820 6380,3820 6405.43,3794.57 6405.43,3366.72 6388.71,3350 6340,3350 6320,3370 6160,3370 6148.7,3358.7 6148.7,3207.2 6099.49,3157.99 6047.99,3157.99 6030,3140 5880,3140 5850,3170
GND on Top Layer "NONET_L-01_P-001" (solid, pour order 6): 7800,3880 7820,3860 7820,3560 7800,3540 7420,3540 7400,3560 7400,3860 7420,3880
GND_INT on Top Layer "NONET_L-01_P-001" (solid, pour order 4): 8594.94,3845.06 8560,3880 7900,3880 7880,3860 7880,3520 7900,3500 8560,3500 8594.94,3534.94
MAIN_VDC_IN on Top Layer "NONET_L-01_P-001" (solid, pour order 3): 9800,3230 9800,3460 9920,3580 9920,3870 9940,3890 10170,3890 10190,3870 10190,3200 10170,3180 9850,3180
NetC23_2 on Top Layer "NONET_L-01_P-001" (solid, pour order 2): 9390,3400 9420,3430 9540,3430 9550,3440 9550,3580 9520,3610 9220,3610 9190,3580 9190,3540 9160,3510 8730,3510 8710,3490 8710,3210 8750,3170 9370,3170 9390,3190
+3V3_D on Int2 (PWR) "NONET_L-01_P-001" (solid, pour order 21): 8200,2580 8900,2580 8940,2620 8940,2710 8970,2740 9000,2740 9030,2710 9030,2640 9080,2590 10110,2590 10170,2530 10170,130 10080,40 140,40 40,140 40,3780 140,3880 4165,3880 4210,3835 4210,3535 4175,3500 3740,3500 3520,3720 1920,3720 1850,3650 1850,730 1960,620 6240,620
+8V on Int2 (PWR) "NONET_L-01_P-001" (solid, pour order 19): 6273.06,3100.12 6372.94,3200 7750,3200 7800,3250 7800,3800 7730,3870 4255,3870 4220,3835 4220,3520 4180,3480 3740,3480 3520,3700 1930,3700 1882,3652 1880,3631 1880,2956 1995.62,2853.56 3668.44,2853.56 4180,2342 4180,1460 4340,1300 5600,1300 6273.98,1973.98 6273.98,2920
NetC27_2 on Int2 (PWR) "NONET_L-01_P-001" (solid, pour order 25): 7900,3900 8550,3900 8600,3850 8600,3250 8550,3200 7900,3200 7875,3225 7875,3875
GND_IN on Int2 (PWR) "NONET_L-01_P-001" (solid, pour order 24): 10160,3820 10120,3860 10080,3860 8760,3860 8740,3840 8740,3200 8760,3180 10140,3180 10160,3200
+3V3 on Int2 (PWR) "NONET_L-01_P-001" (solid, pour order 20): 10020,3140 10140,3020 10140,2640 10100,2600 9080,2600 9040,2640 9040,2720 9010,2750 8960,2750 8930,2720 8930,2630 8900,2600 8180,2600 6840,1260 6220,640 2040,640 1870,810 1870,2750 1950,2830 3653,2830 4150,2333 4150,1460 4340,1270 5610,1270 6310,1970 6310,3110 6380,3180 7860,3180 7900,3140
GND on Int1 (GND) "NONET_L-01_P-001" (solid, pour order 17): 7802.36,3897.64 7830,3870 7830,3210 7900,3140 10022.36,3140 10196.85,2960.81 10196.85,0 0,0 0,3897.64
GND_INT on Int1 (GND) "NONET_L-01_P-001" (solid, pour order 23): 7900,3900 8550,3900 8600,3850 8600,3250 8550,3200 7900,3200 7875,3225 7875,3875
GND_IN on Int1 (GND) "NONET_L-01_P-001" (solid, pour order 22): 8740,3890 8700,3850 8700,3217.32 8748.03,3169.29 10159.29,3169.29 10190,3200 10190,3870 10170,3890

## Keep-outs
Top Layer:
  circle w10: c10060,610 r157.48
  circle w10: c10060,3120 r157.48
  circle w10: c200,3120 r157.48
  circle w10: c200,610 r157.48
  circle w10: c1490,1095 r157.48
  circle w10: c3060,610 r157.48
  circle w10: c3700,610 r157.48
  circle w10: c3060,3120 r157.48
  circle w10: c3700,3120 r157.48
  circle w10: c7200,610 r157.48
  circle w10: c6560,610 r157.48
  circle w10: c7200,3120 r157.48
  circle w10: c6560,3120 r157.48
Bottom Layer:
  circle w10: c10060,610 r157.48
  circle w10: c10060,3120 r157.48
  circle w10: c200,3120 r157.48
  circle w10: c200,610 r157.48
  circle w10: c1490,1095 r157.48
  circle w10: c3060,610 r157.48
  circle w10: c3700,610 r157.48
  circle w10: c3060,3120 r157.48
  circle w10: c3700,3120 r157.48
  circle w10: c7200,610 r157.48
  circle w10: c6560,610 r157.48
  circle w10: c7200,3120 r157.48
  circle w10: c6560,3120 r157.48

## Other copper
Top Layer:
  region net GND: 1807.87,2945.39 1774.02,2945.39 1774.02,3017.19 1743.76,3017.19 1743.7,3017.24 1743.7,3139.29 1838.19,3139.29 1838.19,3017.24 1807.88,3017.24

## Silkscreen, mask and mechanical layers (free items; w line width, h text height)
Top Overlay:
  drawing of 18 lines, arcs and shapes, not listed
Drill Drawing:
  drawing of 412 lines, arcs and shapes, not listed
  text "Symbol" at 10711.5,3787.5 h72
  text "Count" at 11217.38,3787.5 h72
  text "Hole Size" at 11877.2,3787.5 h72
  text "Plated" at 13016.86,3787.5 h72
  text "Hole Type" at 13522.74,3787.5 h72
  text "Drill Layer Pair" at 14256.54,3787.5 h72
  text "Via/Pad" at 15756.09,3787.5 h72
  text "Pad Shape" at 16345.94,3787.5 h72
  text "Template" at 17091.74,3787.5 h72
  text "Description" at 18141.44,3787.5 h72
  text "Hole Tolerance (+)" at 18995.2,3787.5 h72
  text "Hole Tolerance (-)" at 20328.81,3787.5 h72
  text "1" at 11217.38,3637.5 h60
  text "66.93mil (1.700mm)" at 11877.2,3637.5 h60
  text "NPTH" at 13016.86,3637.5 h60
  text "Round" at 13522.74,3637.5 h60
  text "Top Layer - Bottom Layer" at 14256.54,3637.5 h60
  text "Pad" at 15756.09,3637.5 h60
  text "Rounded" at 16345.94,3637.5 h60
  text "c0hn170" at 17091.74,3637.5 h60
  text "1" at 11217.38,3487.5 h60
  text "70.87mil (1.800mm)" at 11877.2,3487.5 h60
  text "NPTH" at 13016.86,3487.5 h60
  text "Round" at 13522.74,3487.5 h60
  text "Top Layer - Bottom Layer" at 14256.54,3487.5 h60
  text "Pad" at 15756.09,3487.5 h60
  text "Rounded" at 16345.94,3487.5 h60
  text "c0hn180" at 17091.74,3487.5 h60
  text "3" at 11217.38,3337.5 h60
  text "43.31mil (1.100mm)" at 11877.2,3337.5 h60
  text "PTH" at 13016.86,3337.5 h60
  text "Round" at 13522.74,3337.5 h60
  text "Top Layer - Bottom Layer" at 14256.54,3337.5 h60
  text "Pad" at 15756.09,3337.5 h60
  text "(Mixed)" at 16345.94,3337.5 h60
  text "(Mixed)" at 17091.74,3337.5 h60
  text "9" at 11217.38,3187.5 h60
  text "11.81mil (0.300mm)" at 11877.2,3187.5 h60
  text "PTH" at 13016.86,3187.5 h60
  text "Round" at 13522.74,3187.5 h60
  text "Top Layer - Bottom Layer" at 14256.54,3187.5 h60
  text "Via" at 15756.09,3187.5 h60
  text "Rounded" at 16345.94,3187.5 h60
  text "v60h30m60" at 17091.74,3187.5 h60
  text "13" at 11217.38,3037.5 h60
  text "125.00mil (3.175mm)" at 11877.2,3037.5 h60
  text "PTH" at 13016.86,3037.5 h60
  text "Round" at 13522.74,3037.5 h60
  text "Top Layer - Bottom Layer" at 14256.54,3037.5 h60
  text "Pad" at 15756.09,3037.5 h60
  text "Rounded" at 16345.94,3037.5 h60
  text "c500h318" at 17091.74,3037.5 h60
  text "14" at 11217.38,2887.5 h60
  text "39.37mil (1.000mm)" at 11877.2,2887.5 h60
  text "PTH" at 13016.86,2887.5 h60
  text "Round" at 13522.74,2887.5 h60
  text "Top Layer - Bottom Layer" at 14256.54,2887.5 h60
  text "Pad" at 15756.09,2887.5 h60
  text "(Mixed)" at 16345.94,2887.5 h60
  text "(Mixed)" at 17091.74,2887.5 h60
  text "14" at 11217.38,2737.5 h60
  text "43.31mil (1.100mm)" at 11877.2,2737.5 h60
  text "PTH" at 13016.86,2737.5 h60
  text "Round" at 13522.74,2737.5 h60
  text "Top Layer - Bottom Layer" at 14256.54,2737.5 h60
  text "Pad" at 15756.09,2737.5 h60
  text "Rounded" at 16345.94,2737.5 h60
  text "c200h110(Tol0-25)" at 17091.74,2737.5 h60
  text "0.00mil (0.000mm)" at 18995.2,2737.5 h60
  text "9.84mil (0.250mm)" at 20328.81,2737.5 h60
  text "20" at 11217.38,2587.5 h60
  text "9.84mil (0.250mm)" at 11877.2,2587.5 h60
  text "PTH" at 13016.86,2587.5 h60
  text "Round" at 13522.74,2587.5 h60
  text "Top Layer - Bottom Layer" at 14256.54,2587.5 h60
  text "Via" at 15756.09,2587.5 h60
  text "Rounded" at 16345.94,2587.5 h60
  text "v50h25m0mx0" at 17091.74,2587.5 h60
  text "67" at 11217.38,2437.5 h60
  text "7.87mil (0.200mm)" at 11877.2,2437.5 h60
  text "PTH" at 13016.86,2437.5 h60
  text "Round" at 13522.74,2437.5 h60
  text "Top Layer - Bottom Layer" at 14256.54,2437.5 h60
  text "Via" at 15756.09,2437.5 h60
  text "Rounded" at 16345.94,2437.5 h60
  text "(Mixed)" at 17091.74,2437.5 h60
  text "2396" at 11217.38,2287.5 h60
  text "10.00mil (0.254mm)" at 11877.2,2287.5 h60
  text "PTH" at 13016.86,2287.5 h60
  text "Round" at 13522.74,2287.5 h60
  text "Top Layer - Bottom Layer" at 14256.54,2287.5 h60
  text "Via" at 15756.09,2287.5 h60
  text "Rounded" at 16345.94,2287.5 h60
  text "v56h25m0mx0" at 17091.74,2287.5 h60
  text "2538 Total" at 11217.38,2137.5 h60
  text "Layer" at 10785.8,1793 h60
  text "Name" at 11195.71,1793 h60
  text "Material" at 12125.45,1793 h60
  text "Thickness" at 12725.3,1793 h60
  text "Constant" at 13375.14,1793 h60
  text "Board Layer Stack" at 13945,1793 h60
  text "Top Overlay" at 11195.71,1673 h60
  text "Top Solder" at 11195.71,1553 h60
  text "SM-001" at 12125.45,1553 h60
  text "0.025mm" at 12725.3,1553 h60
  text "3.5" at 13375.14,1553 h60
  text "1" at 10785.8,1433 h60
  text "Top Layer" at 11195.71,1433 h60
  text "CF-004" at 12125.45,1433 h60
  text "0.018mm" at 12725.3,1433 h60
  text "Dielectric 1" at 11195.71,1313 h60
  text "PP-023" at 12125.45,1313 h60
  text "0.406mm" at 12725.3,1313 h60
  text "4.25" at 13375.14,1313 h60
  text "2" at 10785.8,1193 h60
  text "Int1 (GND)" at 11195.71,1193 h60
  text "CF-004" at 12125.45,1193 h60
  text "0.035mm" at 12725.3,1193 h60
  text "Dielectric 2" at 11195.71,1073 h60
  text "Core-039" at 12125.45,1073 h60
  text "0.610mm" at 12725.3,1073 h60
  text "4.25" at 13375.14,1073 h60
  text "3" at 10785.8,953 h60
  text "Int2 (PWR)" at 11195.71,953 h60
  text "CF-004" at 12125.45,953 h60
  text "0.035mm" at 12725.3,953 h60
  text "Dielectric 3" at 11195.71,833 h60
  text "PP-023" at 12125.45,833 h60
  text "0.406mm" at 12725.3,833 h60
  text "4.25" at 13375.14,833 h60
  text "4" at 10785.8,713 h60
  text "Bottom Layer" at 11195.71,713 h60
  text "CF-004" at 12125.45,713 h60
  text "0.018mm" at 12725.3,713 h60
  text "Bottom Solder" at 11195.71,593 h60
  text "SM-001" at 12125.45,593 h60
  text "0.025mm" at 12725.3,593 h60
  text "3.5" at 13375.14,593 h60
  text "Bottom Overlay" at 11195.71,473 h60
Board:
  the board outline again, w5

## Text inside footprints (layer, text, board x,y; h text height)
BT1: Top Overlay "+" at 8013.78,434.46 h39.37 r180; Top Overlay "+" at 9008.86,434.46 h39.37 r180
J6: Mechanical 15 "PCB EDGE" at 387.4,-12.55 h19.68 r180
J7: Mechanical 15 "PCB EDGE" at 5257.4,-12.55 h19.68 r180
U4: Mechanical 13 "*" at 8312,1747.48 h50; Top Overlay "*" at 8312,1747.48 h50